# Altium PCB 边缘网关-17KF4-END.PcbDoc (part 1 of 2)
Units mil, origin at the board's own origin, x right, y up, seen from the top; angles counter-clockwise.
Board outline 8695 x 6025 mil, 2 copper layers (Top Layer, Bottom Layer); 152 components, 173 nets, 594 pads, 724 vias.
Unrouted connection lines stored in the file: 769.
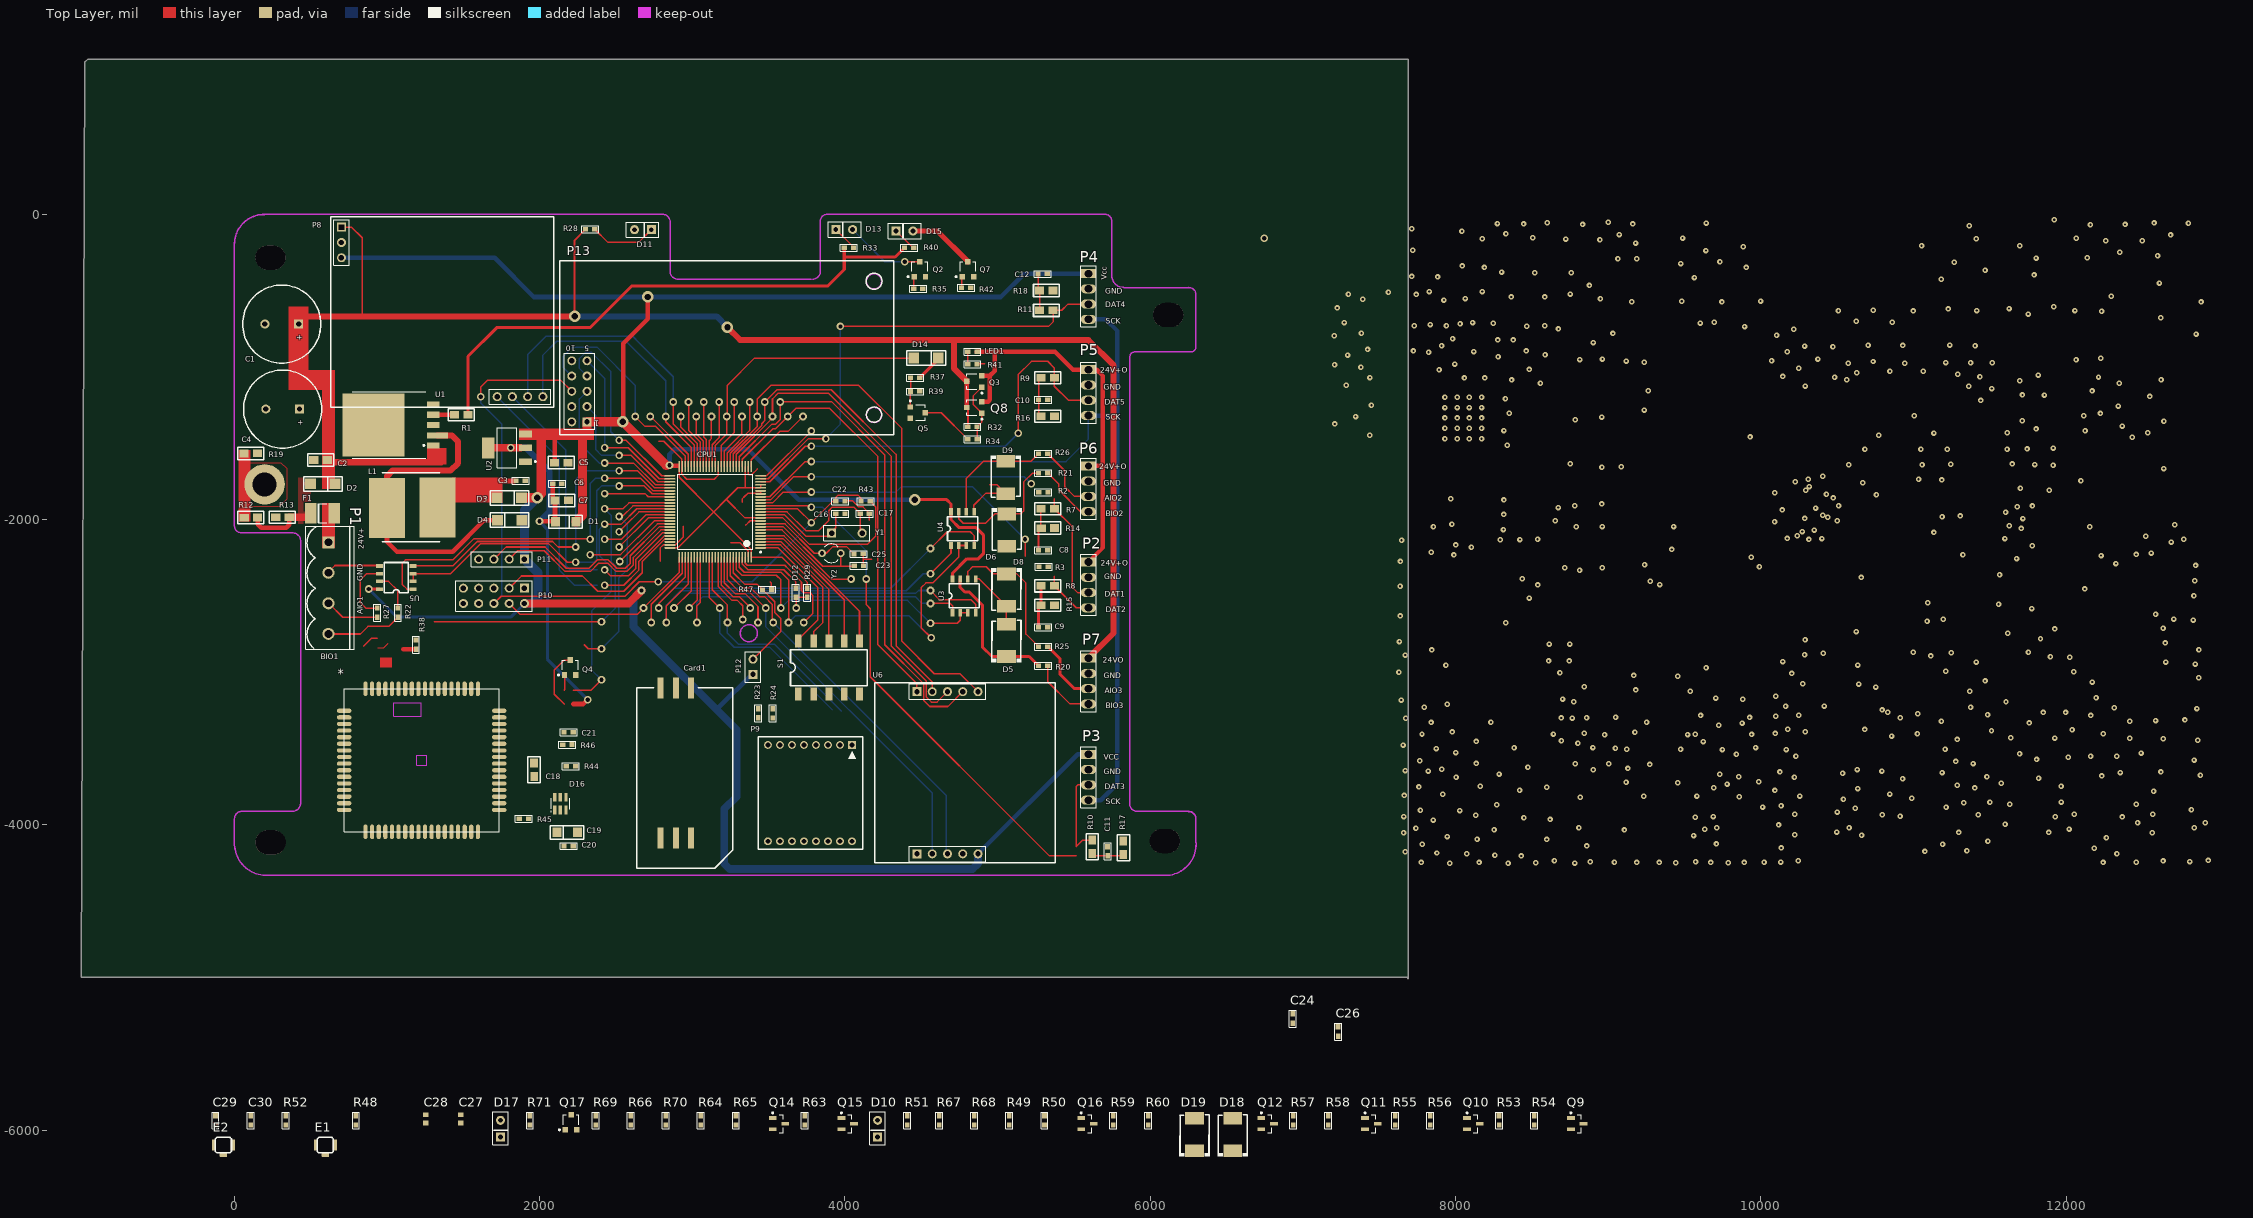
[diagram p0: Top Layer view]
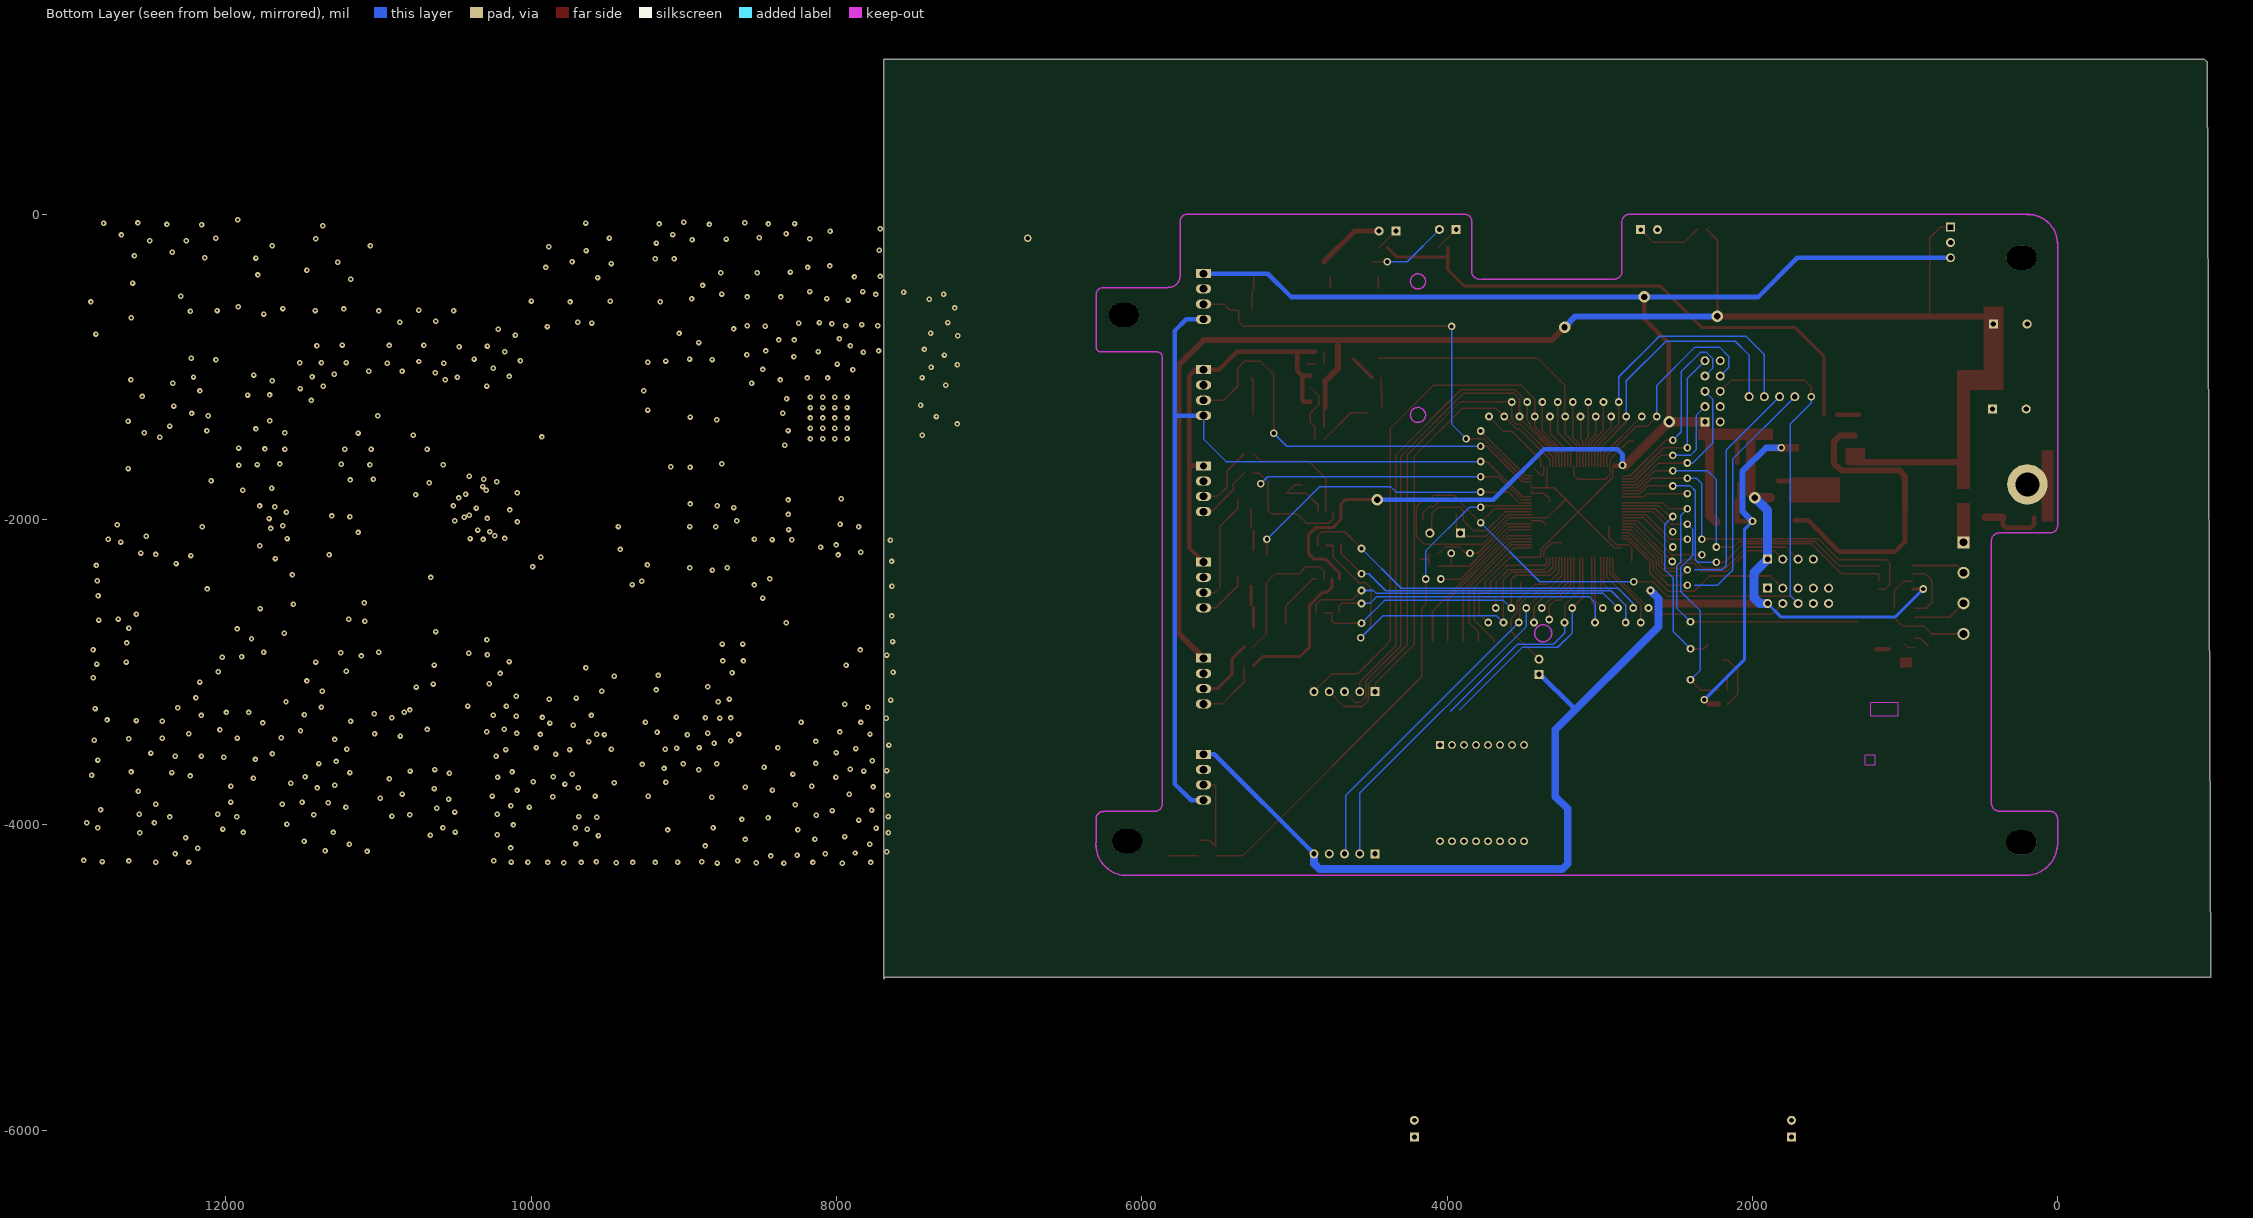
[diagram p1: Bottom Layer view, seen from below]

## Layer stack, top to bottom
Top Solder: solder mask 0.4, Solder Resist, Dk 3.5
Top Layer: signal copper 30
Dielectric1: dielectric 12.6, FR-4, Dk 4.8
Bottom Layer: signal copper 1.4
Bottom Solder: solder mask 0.4, Solder Resist, Dk 3.5

## Board outline
-980.2,997 -960.2,1017 7689.8,1017 7689.8,-5008 7679.8,-4998 -1005.2,-4998

## Design rules (kind name [scope] priority, off if disabled: settings)
Clearance Clearance_1 [All] p1: gap=6
ComponentClearance [All] p1: gap=0 collisioncheckmode=3 verticalgap=0 showdistances=FALSE
FabricationTestPointUsage TestPointUsage [All] p1: valid=0 allowmultiple=FALSE
FabricationTestpoint Testpoint [All] p1: side=3 testpointundercomponent=TRUE minsize=40 maxsize=100 preferedsize=60 minholesize=0 maxholesize=40 preferedholesize=32 testpointgrid=1 allowsidetop=TRUE allowsidebottom=TRUE usegrid=TRUE gridtolerance=0.01
HoleSize [All] p1: absolutevalues=TRUE maxlimit=10000 minlimit=0 maxpercent=80.000 minpercent=20.000
MinimumSolderMaskSliver [All] p1: minsoldermaskwidth=0
PlaneClearance PlaneClearance_1 [All] p1: clearance=5
PlaneConnect [All] p1: planeconnectstyle=Relief reliefexpansion=12 reliefentries=4 reliefconductorwidth=12 reliefairgap=20
PolygonConnect [All] p1: connectstyle=Relief reliefconductorwidth=20 reliefentries=4 polygonreliefangle="90 Angle" airgapwidth=10
RoutingVias [All] p1: holewidth=28 width=50 viastyle="Through Hole" minholewidth=0 minwidth=0 maxholewidth=2800 maxwidth=5000
SilkToSolderMaskClearance SilkscreenOverComponentPads [IsPad] p1: minsilkscreentomaskgap=0 clearancetoexposedcopper=TRUE
SolderMaskExpansion [All] p1: expansion=4
Width [All] p1: maxlimit=10000 minlimit=99999 preferedwidth=10 toplayer_minwidth=0 bottomlayer_minwidth=0 minimp=50.000000 maximp=50.000000 favimp=50.000000
22 further rules are at their usual default settings.

## Components (designator, comment, footprint, x,y, rotation, side; value= is the part's Value field where it differs from the comment)
* "U7" PCBComponent_1 719,-4046 r0 top
C1 "C_470uF/63V" C470UF50V-H 310,-720 r90 top
C2 "C_0.1uF" 0805 520,-1610 r90 top
C3 "C_0.1uF" 0603 1864.77,-1745 r0 top
C4 "2200uF/25V" C470UF50V-H 316,-1277 r90 top
C5 "100nF" 0805 2186,-1627 r270 top
C6 "100nF" 0603 2104.81,-1765 r0 top
C7 "4.7uF" 0805 2100,-1875 r90 top
C8 "C_0.1uF" 0603 5307.67,-2202 r180 top
C9 "C_0.1uF" 0603 5288.2,-2704.63 r0 top
C10 "C_0.1uF" 0603 5288.2,-1214.97 r0 top
C11 "C_0.1uF" 0603 5719,-4183 r90 top
C12 "C_0.1uF" 0603 5285,-390 r0 top
C16 "C_10pF" 0603 3960,-1960 r0 top
C17 "C_10pF" 0603 4120,-1960 r0 top
C18 "C_0.1uF" 0805 1963,-3683 r180 top
C19 "220uF" 1206 2180,-4050 r0 top
C20 "C_0.1uF" 0603 2199.06,-4140 r180 top
C21 "C_0.1uF" 0603 2199.06,-3395.04 r180 top
C22 "C_0.1uF" 0603 3960,-1880 r0 top
C23 "C_0.1uF" 0603 4081,-2302 r0 top
C24 "C_10pF" 0603 6933,-5279 r90 top
C25 "C_10pF" 0603 4079.49,-2224.49 r0 top
C26 "C_100nF" 0603 7229,-5364 r90 top
C27 "470pF" 1608[0603] 1482.8,-5927 r90 top
C28 "0.1uF" 1608[0603] 1252.8,-5927 r90 top
C29 "缺省" 0603 -125.2,-5947 r90 top
C30 "缺省" 0603 104.8,-5947 r90 top
Card1 "Card" SIM 2792,-3103 r270 top
CPU1 "STM32F103VET6" LQFP100_N 3150,-1950 r180 top
D1 "1N4148" 1206 2170,-2015 r180 top
D2 "MURA240" 1N4007-M7 663.21,-1763.98 r180 top
D3 "SS36" 1N4007-M7 1885,-1855 r180 top
D4 "SS36" 1N4007-M7 1719.05,-2007 r0 top
D5 "SMBJ6.8CA" DO-214AB 5057.77,-2791.22 r90 top
D6 "SMBJ6.8CA" DO-214AB 5060,-2070 r270 top
D8 "SMBJ6.8CA" DO-214AB 5058,-2463 r270 top
D9 "SMBJ6.8CA" DO-214AB 5053,-1724 r270 top
D10 "LED BLUE" LED-3mm 4213.8,-6046 r90 top
D11 "LED RED" LED-3MM 2731,-101 r180 top
D12 "Green" 0603 3680,-2470 r270 top
D13 "LED RED" LED-3MM 3940,-100 r0 top
D14 "1N4007" 1N4007-M7 4615,-940 r180 top
D15 "LED GREEN" LED-3MM 4335,-110 r0 top
D16 "SRV05-4" SOT23-6 2135,-3861 r0 top
D17 "LED BLUE" LED-3mm 1742.8,-6046 r90 top
D18 "SMBJ6.8CA" DO-214AB 6539.8,-6029 r90 top
D19 "SMBJ6.8CA" DO-214AB 6289.8,-6029 r90 top
E1 "Antenna" IPX 595.8,-6098 r0 top
E2 "Antenna" IPX -72.2,-6098 r0 top
F1 "自恢复保险丝" 1812 576,-1959 r0 top
L1 "贴片电感" L101 1120,-1920 r180 top
LED1 "LED 3mm" 0603 4825.53,-900 r0 top
P1 "进线端子" 5.08MM-4PL 616,-2149 r270 top
P2 "Header 4" HDR1X4#1 5595,-2278.47 r270 top
P3 "Header 4" HDR1X4#1 5595,-3538.31 r270 top
P4 "Header 4" HDR1X4#1 5595,-388.7 r270 top
P5 "Header 4" HDR1X4#1 5595,-1018.62 r270 top
P6 "Header 4" HDR1X4#2 5595,-1648.54 r270 top
P7 "Header 4" HDR1X4#1 5595,-2908.39 r270 top
P8 "Header 7" USB2 711,-715 r0 top
P9 "排针" WIFI2 4046,-3477 r270 top
P10 "SWD" HDR2X5_CEN 1900,-2450 r180 top
P11 "下载线" HDR1X4#3 1900,-2260 r180 top
P12 "跳线" HDR1X2 3397,-3015 r90 top
P13 "TCP/IP" TCP-IP 2310,-1360 r180 top
Q2 "9013" SOT-23 4490,-360 r0 top
Q3 "2N2907" Q 4798.42,-1095 r90 top
Q4 "9013" SOT-23 2200,-2970 r0 top
Q5 "5551" Q 4526,-1300 r270 top
Q7 "9013" SOT-23 4805,-360 r0 top
Q8 "2N2907" Q 4798.42,-1266 r90 top
Q9 "MMBT3904" SOT23_N 8796.8,-5958 r0 top
Q10 "MMBT3904" SOT23_N 8116.8,-5958 r0 top
Q11 "MMBT3904" SOT23_N 7448.8,-5958 r0 top
Q12 "MMBT3904" SOT23_N 6768.8,-5958 r0 top
Q14 "MMBT3904" SOT23_N 3567.8,-5958 r0 top
Q15 "MMBT3904" SOT23_N 4017.8,-5958 r0 top
Q16 "MMBT3904" SOT23_N 5588.8,-5958 r0 top
Q17 "9013" SOT-23 2205.8,-5949 r0 top
R1 "330R" 0805 1530,-1314 r270 top
R2 "1.5K" 0603 5310,-1823 r180 top
R3 "100R" 0603 5311,-2311 r180 top
R7 "50R" 0805 5283.39,-1929.57 r90 top
R8 "50R" 0805 5283.39,-2434.9 r90 top
R9 "50R" 0805 5283.39,-1071.57 r90 top
R10 "50R" 0805 5619.38,-4188.61 r180 top
R11 "50R" 0805 5275,-630 r90 top
R12 "压敏电阻" 0805 152,-1987 r270 top
R13 "压敏电阻" 0805 359,-1986 r270 top
R14 "50R" 0805 5373.39,-2055.9 r270 top
R15 "50R" 0805 5283.39,-2561.24 r90 top
R16 "50R" 0805 5283.39,-1324.24 r90 top
R17 "50R" 0805 5824,-4194 r180 top
R18 "50R" 0805 5275,-500 r90 top
R19 "压敏电阻" 0805 151,-1567 r270 top
R20 "100R" 0603 5307.67,-2960 r180 top
R21 "100R" 0603 5307.67,-1696.67 r180 top
R22 "100R" 0603 1070,-2620 r90 top
R23 "470R" 0603 3434,-3259 r270 top
R24 "470R" 0603 3528,-3260 r270 top
R25 "100R" 0603 5307.67,-2833.67 r180 top
R26 "100R" 0603 5307.67,-1570.33 r180 top
R27 "100R" 0603 935,-2620 r90 top
R28 "R_5.1K" 0603 2340,-100 r180 top
R29 "R_1K" 0603 3755,-2470 r270 top
R32 "R_10K" 0603 4845,-1394 r180 top
R33 "R_1K" 0603 4035,-220 r180 top
R34 "R_1K" 0603 4825.53,-1474 r0 top
R35 "R_2.2K" 0603 4490,-490 r180 top
R37 "R_1K" 0603 4449.81,-1070 r0 top
R38 "缺省" 0603 1191,-2810 r270 top
R39 "R_10K" 0603 4449.81,-1160 r0 top
R40 "R_1K" 0603 4430,-220 r180 top
R41 "R_5.1K" 0603 4845,-985 r180 top
R42 "R_2.2K" 0603 4803.67,-483 r180 top
R43 "R_3.3K" 0603 4125,-1880 r0 top
R44 "20R" 0603 2195,-3616 r0 top
R45 "20R" 0603 1887,-3960 r0 top
R46 "20R" 0603 2172,-3473 r0 top
R47 "R_3.3K" 0603 3500,-2460 r180 top
R48 "470R" 0603 794.8,-5947 r90 top
R49 "Res2" 0603 5075.8,-5947 r90 top
R50 "Res2" 0603 5305.8,-5947 r90 top
R51 "Res2" 0603 4405.8,-5947 r90 top
R52 "0" 0603 334.8,-5947 r90 top
R53 "10K" 0603 8283.8,-5947 r90 top
R54 "4.7K" 0603 8513.8,-5947 r90 top
R55 "10K" 0603 7603.8,-5947 r90 top
R56 "4.7K" 0603 7833.8,-5947 r90 top
R57 "10K" 0603 6935.8,-5947 r90 top
R58 "4.7K" 0603 7165.8,-5947 r90 top
R59 "10K" 0603 5755.8,-5947 r90 top
R60 "4.7K" 0603 5985.8,-5947 r90 top
R63 "10K" 0603 3734.8,-5947 r90 top
R64 "10K" 0603 3054.8,-5947 r90 top
R65 "47K" 0603 3284.8,-5947 r90 top
R66 "4.7K" 0603 2594.8,-5947 r90 top
R67 "10K" 0603 4615.8,-5947 r90 top
R68 "4.7K" 0603 4845.8,-5947 r90 top
R69 "Res2" 0603 2364.8,-5947 r90 top
R70 "Res2" 0603 2824.8,-5947 r90 top
R71 "Res2" 0603 1934.8,-5947 r90 top
S1 "贴片拨码开关" SWITCH10 3895,-2970 r0 top
U1 "LM2576HV-3.3V" TO-263(S) 900,-1380 r0 top
U2 "AMS1117-1.8V" SOT223 1785,-1530 r90 top
U3 "SN65HVD11" SN65HVD11 4780,-2500 r0 top
U4 "SN65HVD11" SN65HVD11 4770,-2060 r0 top
U5 "SN65HVD11" SN65HVD11 1060,-2380 r90 top
U6 "433M" 433M 5377,-2989.72 r270 top
Y1 "XTAL 8M" "XTAL 8M" 3912,-2089 r0 top
Y2 "XTAL  32.768K" R38 3911,-2221 r270 top

## Footprints (in the part's own frame and the unit in brackets; to place one, negate y for a bottom-side part, rotate by r counter-clockwise, add the part's x,y. Pads: shape width x height; smd on the part's side, far side on the other; paste and mask are expansions set on the pad)
1N4007-M7 [mm]
  rect 1.8x1.8 smd: 1(4.166,0.05) 2(0.096,0.05)
  silkscreen extent -1.12,-1.14 5.33,1.27
5.08MM-4PL [mm]
  rect 2x2 hole 1.3: 1(0,0)
  round 2 hole 1.3: 2(5.08,0) 3(10.16,0) 4(15.24,0)
  silkscreen extent -2.67,-3.75 17.78,4.25
433M [mm]
  rect 1.5x1.5 hole 0.9: 1(3.5,-23) 6(30.5,-23)
  round 1.5 hole 0.9: 2(3.5,-20.46) 3(3.5,-17.92) 4(3.5,-15.38) 5(3.5,-12.84) 7(30.5,-20.46) 8(30.5,-17.92) 9(30.5,-15.38) 10(30.5,-12.84)
  silkscreen extent 2,-30 32,0
0603 [mil] "0603"
  rect 35x30 smd: 1(40,-1) 2(-20.23,-1.34)
  silkscreen extent -46,-24 65,21
0805 [mil]
  rect 50x60 smd: 1(0,0) 2(0.28,-88.04)
  silkscreen extent -40,-130 40,40
1206 [mm]
  rect 1.52x1.6 smd: 1(-1.71,0) 2(1.71,0)
  silkscreen extent -2.79,-1.1 2.79,1.1
1608[0603] [mm] "Chip Capacitor, Body 1.6x0.8mm, IPC High Density"
  rect 0.8x0.9 smd: 1(-0.7,0) 2(0.7,0)
  body extent -0.87,-0.48 0.87,0.48, height 1.3
1812 [mm] "Chip Capacitor; Body 4.5 x 3.2 mm (LxW typ)"
  rect 1.9x3.4 smd: 1(-1.95,0) 2(1.95,0)
  silkscreen extent -0.7,-1.6 0.7,1.6
C470UF50V-H [mm]
  rect 1.5x1.5 hole 0.9: 1(0.02,-2.8)
  round 1.5 hole 0.9: 2(0.02,2.8)
  silkscreen extent -6.5,-6.5 6.5,6.5
DO-214AB [mm]
  rect 2.1x3.1 smd: 1(2.7,0) 2(-2.7,0)
  silkscreen extent -3.68,-2.54 3.3,2.54
HDR1X2 [mm] "Connector; Header; 2 Position"
  rect 1.5x1.5 hole 0.9: 1(0,0)
  round 1.5 hole 0.9: 2(2.54,0)
  silkscreen extent -1.27,-1.27 3.81,1.27
HDR1X4#1 [mm] "Connector; Header; 4 Position"
  rect 1.5x2.54 hole 1.27: 1(0,0)
  oval 1.5x2.54 hole 1.27: 2(2.54,0) 3(5.08,0) 4(7.62,0)
  silkscreen extent -1.27,-1.27 8.89,1.27
HDR1X4#2 [mm] "Connector; Header; 4 Position"
  rect 1.5x2.54 hole 1.143: 1(0,0)
  oval 1.5x2.54 hole 1.27: 2(2.54,0) 3(5.08,0) 4(7.62,0)
  silkscreen extent -1.27,-1.27 8.89,1.27
HDR1X4#3 [mm] "Connector; Header; 4 Position"
  rect 1.5x1.5 hole 0.9: 1(0,0)
  round 1.5 hole 0.9: 2(2.54,0) 3(5.08,0) 4(7.62,0)
  silkscreen extent -1.27,-1.27 8.89,1.27
HDR2X5_CEN [mm] "Connector; Header; 5x2 Position"
  rect 1.5x1.5 hole 0.9: 1(0,0)
  round 1.5 hole 0.9: 2(2.54,0) 3(5.08,0) 4(7.62,0) 5(10.16,0) 6(0,2.54) 7(2.54,2.54) 8(5.08,2.54) 9(7.62,2.54) 10(10.16,2.54)
  silkscreen extent -1.27,-1.27 11.43,3.81
IPX [mil]
  rrect50% 50x31.5 smd: 1(0,-63)
  rect 27.56x70.87 smd: 2(61,1) 4(-61,1)
  silkscreen extent -53,-52 53,51
L101 [mm]
  rect 6x10 smd: 1(3.056,0.127) 2(-5.342,0)
  silkscreen extent -5.72,-5.72 3.81,5.72
LED-3mm [mm]
  rect 1.5x1.5 hole 0.8: 1(0,0)
  round 1.5 hole 0.8: 2(2.794,0)
  silkscreen extent -1.27,-1.27 4.19,1.27
LED-3MM [mm] "Connector; Header; 5 Position"
  rect 1.5x1.5 hole 0.8: 1(0,0)
  round 1.5 hole 0.8: 2(2.794,0)
  silkscreen extent -1.27,-1.27 4.19,1.27
LQFP100_N [mm]
  oval 1.8x0.3 smd: 1(-7.55,6) 2(-7.55,5.5) 3(-7.55,5) 4(-7.55,4.5) 5(-7.55,4) 6(-7.55,3.5) 7(-7.55,3) 8(-7.55,2.5) 9(-7.55,2) 10(-7.55,1.5) 11(-7.55,1) 12(-7.55,0.5) 13(-7.55,0) 14(-7.55,-0.5) 15(-7.55,-1) 16(-7.55,-1.5) 17(-7.55,-2) 18(-7.55,-2.5) 19(-7.55,-3) 20(-7.55,-3.5) 21(-7.55,-4) 22(-7.55,-4.5) 23(-7.55,-5) 24(-7.55,-5.5) 25(-7.55,-6) 51(7.55,-6) 52(7.55,-5.5) 53(7.55,-5) 54(7.55,-4.5) 55(7.55,-4) 56(7.55,-3.5) 57(7.55,-3) 58(7.55,-2.5) 59(7.55,-2) 60(7.55,-1.5) 61(7.55,-1) 62(7.55,-0.5) 63(7.55,0) 64(7.55,0.5) 65(7.55,1) 66(7.55,1.5) 67(7.55,2) 68(7.55,2.5) 69(7.55,3) 70(7.55,3.5) 71(7.55,4) 72(7.55,4.5) 73(7.55,5) 74(7.55,5.5) 75(7.55,6)
  oval 0.3x1.8 smd: 26(-6,-7.55) 27(-5.5,-7.55) 28(-5,-7.55) 29(-4.5,-7.55) 30(-4,-7.55) 31(-3.5,-7.55) 32(-3,-7.55) 33(-2.5,-7.55) 34(-2,-7.55) 35(-1.5,-7.55) 36(-1,-7.55) 37(-0.5,-7.55) 38(0,-7.55) 39(0.5,-7.55) 40(1,-7.55) 41(1.5,-7.55) 42(2,-7.55) 43(2.5,-7.55) 44(3,-7.55) 45(3.5,-7.55) 46(4,-7.55) 47(4.5,-7.55) 48(5,-7.55) 49(5.5,-7.55) 50(6,-7.55) 76(6,7.55) 77(5.5,7.55) 78(5,7.55) 79(4.5,7.55) 80(4,7.55) 81(3.5,7.55) 82(3,7.55) 83(2.5,7.55) 84(2,7.55) 85(1.5,7.55) 86(1,7.55) 87(0.5,7.55) 88(0,7.55) 89(-0.5,7.55) 90(-1,7.55) 91(-1.5,7.55) 92(-2,7.55) 93(-2.5,7.55) 94(-3,7.55) 95(-3.5,7.55) 96(-4,7.55) 97(-4.5,7.55) 98(-5,7.55) 99(-5.5,7.55) 100(-6,7.55)
  silkscreen extent -7.68,-6.25 6.25,6.82, body extent -7,-7 7,7, height 1.6
PCBComponent_1 [mm]
  oval 0.7x2.4 smd: 1(3.55,0) 1(3.55,0) 2(4.65,0) 3(5.75,0) 4(6.85,0) 5(7.95,0) 6(9.05,0) 7(10.15,0) 8(11.25,0) 9(12.35,0) 10(13.45,0) 11(14.55,0) 12(15.65,0) 13(16.75,0) 14(17.85,0) 15(18.95,0) 16(20.05,0) 16(20.05,0) 17(21.15,0) 17(21.15,0) 18(22.25,0) 35(22.25,23.8) 35(22.25,23.8) 36(21.15,23.8) 37(20.05,23.8) 38(18.95,23.8) 39(17.85,23.8) 40(16.75,23.8) 41(15.65,23.8) 42(14.55,23.8) 43(13.45,23.8) 44(12.35,23.8) 45(11.25,23.8) 46(10.15,23.8) 47(9.05,23.8) 48(7.95,23.8) 49(6.85,23.8) 50(5.75,23.8) 51(4.65,23.8) 52(3.55,23.8)
  oval 2.4x0.7 smd: 19(25.8,3.65) 19(25.8,3.65) 20(25.8,4.75) 21(25.8,5.85) 22(25.8,6.95) 23(25.8,8.05) 24(25.8,9.15) 25(25.8,10.25) 26(25.8,11.35) 27(25.8,12.45) 28(25.8,13.55) 29(25.8,14.65) 30(25.8,15.75) 31(25.8,16.85) 32(25.8,17.95) 33(25.8,19.05) 34(25.8,20.15) 53(0,20.15) 53(0,20.15) 54(0,19.05) 55(0,17.95) 56(0,16.85) 57(0,15.75) 58(0,14.65) 59(0,13.55) 60(0,12.45) 61(0,11.35) 62(0,10.25) 63(0,9.15) 64(0,8.05) 65(0,6.95) 66(0,5.85) 67(0,4.75) 68(0,3.65)
  Keep-Out Layer lines w0.127: 8.255,19.26 12.85,19.26 12.85,21.46 8.255,21.46 8.255,19.26 ; 12.065,11.049 13.716,11.049 13.716,12.7 12.065,12.7 12.065,11.049
  silkscreen extent 0,0 25.8,23.8
Q [mm]
  rect 0.9x0.95 smd: 1(0.95,-2.5) 2(-0.95,-2.5) 3(0,0)
  silkscreen extent -2.07,-2.63 1.3,0
R38 [mm] "Crystal, Thru-Hole; 2 Leads; Body 3.1 x 8.2 mm (Dia.xH)"
  round 1.3 hole 0.7: 1(0,1.55) 2(0,-1.55)
  silkscreen extent -1.55,-1.19 1.55,1.17
SIM [mm]
  rect 3.5x1 smd: 1(0,0) 2(0,2.54) 3(0,5.08) 4(25,0) 5(25,2.54) 6(25,5.08)
  silkscreen extent 0,-4 30,12
SN65HVD11 [mm]
  rect 0.6x1.2 smd: 1(-1.92,-2.8) 2(-0.64,-2.8) 3(0.64,-2.8) 4(1.92,-2.8) 5(1.92,2.8) 6(0.64,2.8) 7(-0.64,2.8) 8(-1.92,2.8)
  silkscreen extent -2.5,-2 2.5,2
SOT23-6 [mm] "SOT-23/SC-74A; 5 Leads; Body 3.1 x 3 mm, inc. leads (LxW max)"
  rect 0.55x1.45 smd: 1(-0.95,-1.075) 2(0,-1.075) 3(0.95,-1.075) 4(0.95,1.075) 5(0,1.075) 6(-0.95,1.075)
  silkscreen extent -1.57,-1.35 1.55,0.9
SOT23_N [mm] "SOT23, 3-Leads, Body 2.9x1.3mm, Pitch 0.95mm, Lead Span 2.3mm, IPC Medium Density"
  rect 1.3x0.6 smd: 1(-1.05,0.95) 2(-1.05,-0.95) 3(1.05,0)
  silkscreen extent -1.17,-1.5 0.7,1.92, body extent -0.7,-1.5 0.7,1.5, height 1.1
SOT223 [mm] "SOT-223/SC-73; 4 Leads; Body 6.7 x 7.3 mm, inc. leads (LxW max)"
  rect 1.1x2.15 smd: 1(-2.3,-3.1) 2(0,-3.1) 3(2.3,-3.1)
  rect 3.5x2.15 smd: 4(0,3.1)
  silkscreen extent -3.35,-4.85 3.35,1.62
SOT-23 [mm] "SOT-23; 3 Leads; Body 3.0 x 2.6 mm, inc. leads (LxW max)"
  rect 0.9x0.95 smd: 1(-0.95,-1.25) 2(0.95,-1.25) 3(0,1.25)
  silkscreen extent -2.07,-1.37 1.3,1.25
SWITCH10 [mm]
  rect 1.1x2.2 smd: 1(-5.08,-4.4) 2(-2.54,-4.4) 3(0,-4.4) 4(2.54,-4.4) 5(5.08,-4.4) 6(5.08,4.4) 7(2.54,4.4) 8(0,4.4) 9(-2.54,4.4) 10(-5.08,4.4)
  silkscreen extent -6.4,-3 6.4,3
TCP-IP [mm]
  rect 1.5x1.5 hole 0.9: 1(0,0)
  round 1.5 hole 0.9: 2(0,-2.54) 3(0,-5.08) 4(0,-7.62) 5(0,-10.16) 6(2.54,0) 7(2.54,-2.54) 8(2.54,-5.08) 9(2.54,-7.62) 10(2.54,-10.16)
  silkscreen extent -51.05,-26.8 4.57,2.16
TO-263(S) [mm]
  rect 2.1x1.05 smd: 1(10.247,-3.425) 3(10.247,-0.025) 4(10.247,1.675) 5(10.247,3.375)
  rect 3.5x1.05 smd: 2(10.947,-1.753)
  rect 10.3x10.5 smd: 3(0.256,0)
  silkscreen extent -3.25,-5.58 9,5.52
USB2 [mm]
  rect 1.5x1.5 hole 0.9 square: 1(-0.254,16.002)
  round 1.5 hole 0.9: 2(25.654,-12.192) 3(28.194,-12.192) 4(30.734,-12.192) 5(33.274,-12.192) 6(-0.254,13.462) 7(-0.254,10.922)
  silkscreen extent -2.03,-13.97 35.05,17.78
WIFI2 [mm]
  rect 1.3x1.3 hole 0.8: 1(0,0)
  round 1.3 hole 0.8: 2(16.03,0) 3(0,-2) 4(16.03,-2) 5(0,-4) 6(16.03,-4) 7(0,-6) 8(16.03,-6) 9(0,-8) 10(16.03,-8) 11(0,-10) 12(16.03,-10) 13(0,-12) 14(16.03,-12) 15(0,-14) 16(16.03,-14)
  silkscreen extent -1.35,-15.57 17.38,1.78
"XTAL 8M" [mm]
  rect 1.5x1.5 hole 0.9: 1(0,0)
  round 1.5 hole 0.9: 2(5.08,0)
  silkscreen extent -1.27,-1.27 6.35,1.27

## Part data
*: library part Component_1
C1: library part "Cap Pol1", "插件 电解电容 13*21"
C2 C3 C5 C6 C7 C8 C9 C10 C11 C12 C16 C17 C18 C20 C21 C22 C23 C24 C25 C26: library part Cap, "贴片电容 0603"
C4: library part "Cap Pol1", "插件 体积13*20mm"
C19: library part "Cap Pol1", "Polarized Capacitor (Radial)"
C27 C28 C29 C30: library part Cap, "Capacitor"
CPU1: library part STM32F103VBT6, "贴片ARM芯片"
D1 D2: library part Diode, "贴片二极管 M7"
D3 D4: library part "Diode 1N4007", "贴片二极管 SMA"
D5 D6 D8 D9 D18 D19: "贴片双向瞬变抑制二极管 D0-214AA"
D10 D11 D13 D17: library part LED0, "插件 发光二极管 5mm 红发红光"
D12: library part "LED 3mm", "贴片发光二极管 0603 绿色"
D14: library part "Diode 1N4007", "1 Amp General Purpose Rectifier"
D15: library part LED0, "插件 发光二极管 5mm 绿发绿光"
D16: library part SMF05C, "SOT363"
E1 E2: "Generic Antenna"
F1: library part "Fuse 2", "1812 1.1A 33V"
L1: library part Inductor, "贴片电感 12*12*7mm 100uH"
LED1: "LED_R"
P1 P11: library part "Header 4", "Header, 4-Pin"
P2 P3 P4 P5 P6 P7: "Header, 4-Pin"
P8: "Header, 7-Pin"
P9: library part "Header 8X2", "插件 8P 间距2mm"
P10 P13 U6: library part "Header 5X2A", "Header, 5-Pin, Dual row"
P12: library part "Header 2", "Header, 2-Pin"
Q2 Q4 Q7 Q17: library part NPN, "贴片三极管MMBT5551 SOT-23"
Q3 Q8: library part PNP, "PNP Bipolar Transistor"
Q5: library part 2N3904, "2N3904"
Q9 Q10 Q11 Q12 Q14 Q15 Q16: "NPN Switching Transistor"
R1 R7 R8 R9 R10 R11 R14 R15 R16 R17 R18: library part Res2, "贴片电阻 0805 精度0.1%"
R2 R3 R20 R21 R22 R25 R26 R27 R29: library part Res2, "贴片电阻 0603"
R12 R13 R19: library part "Res Varistor", "耐压56V 0805"
R23 R24 R48: library part Res1, "贴片电阻 0603"
R28 R33 R35 R44 R45 R46: library part Resistor, "贴片电阻 0603"
R32 R34 R37 R38 R39 R52 R53 R54 R55 R56 R57 R58 R59 R60 R63 R64 R65 R66 R67 R68: library part Res2, "Resistor"
R40 R42: library part Resistor, "Resistor"
R41: library part Res2, "R_10K"
R43 R47: library part Res3, "贴片电阻 0603"
R49 R50 R51 R69 R70 R71: "Resistor"
S1: library part Switch, "5P 2.54MM  黑色"
U1: library part Component_1, "贴片电源芯片 TO-263"
U2: library part AS1117, "VOLTAGE REGULATOR"
U3 U4 U5: "贴片芯片"
Y1: "晶振"
Y2: library part XTAL, "晶振"

## Free pads (board coordinates)
  round 263.78 hole 157.48: 0(198.17,-1769.65)
  rrect100% 196.85x157.48 hole 157.48 slot 196.85 at 0 deg: 0(236,-285) 0(237,-4115) 0(6095.49,-4106.3) 0(6118.11,-660)

## Via types
v1: diameter 36, hole 15, Top Layer to Bottom Layer, 626 vias
v2: diameter 50, hole 28, Top Layer to Bottom Layer, 92 vias
v3: diameter 75, hole 42, Top Layer to Bottom Layer, 6 vias

## Nets (pads, with @x,y where several pads share a name; then routed paths per layer and width w, separated by ;. In a path a pad name is that pad's centre, name@x,y a point inside that pad or via, vN(x,y) a via of type N, cw(c..) or ccw(c..) an arc to the next point about the centre after c; other vN are vias at no path point)
1.8V: C6.2 C7.1 D1.2 U2.2 U2.4 | length 2414.6
  Top Layer w30: v2(1999,-2012) 2099.68,-2012 D1.2@2100,-2012.32 ; C7.1@2084.58,-1859.58 C6.2@2084.58,-1766.34 ; C7.1@2100,-1875 D1.2@2100,-2012.32 ; D1.2@2102.68,-2015 D1.2@2100,-2012.32 ; 2220.23,-3208.66 2286.34,-3208.66 v2(2315,-3180)
  Bottom Layer w20: v2(1999,-2012) 2050,-2063 2050,-2105 2050,-2915 v2(2315,-3180)
  Bottom Layer w40: v2(1810,-1530) 1910,-1530 2065,-1685 2065,-1946 v2(1999,-2012)
1P8: *.17 R54.1 R55.1 R56.1 R58.1 R59.1 R60.1 R66.1 R67.1 R68.1
24V+: C1.1 C2.2 D2.2 P7.1 P8.1 Q3.3 Q8.3 R28.1 R32.1 U1.1 | length 10090
  Top Layer w12: P8.1@701,-85 767,-85 837,-155 837,-669.21 ; v3(2228.79,-669.21) 2228.79,-170.21 R28.1@2300,-99 ; R32.1@4805,-1393 Q8.3@4805,-1272.58
  Top Layer w30: Q8.3@4798.42,-1266 Q3.3@4798.42,-1095
  Top Layer w40: 420.24,-669.21 837,-669.21 v3(2228.79,-669.21) ; C2.2@608.04,-1609.72 623.32,-1625 1355,-1625 ; v3@3229,-739 v3(3230,-740) 3314,-824 4715,-824 ; Q3.3@4798.42,-1095 4715,-1011.58 4715,-824 ; P7.1@5595,-2908.39 5760,-2743.39 5760,-990 5594,-824 4715,-824
  Bottom Layer w40: v3(2228.79,-669.21) 3159.21,-669.21 v3(3230,-740)
24VOUT: LED1.1 P2.1 P5.1 P6.1 Q3.1 Q8.1 | length 2678.6
  Top Layer w30: LED1.1@4865,-901 LED1.1@4865.53,-901 4980,-901 ; Q8.1@4896.84,-1228.6 4937.4,-1228.6 4949.4,-1216.6 4949.4,-1057.6 ; Q3.1@4896.84,-1057.6 4949.4,-1057.6 ; P2.1@5595,-2278.47 5690,-2183.47 5690,-1648.54 5690,-1060 5648.62,-1018.62 P5.1@5595,-1018.62 5493.62,-1018.62 5376,-901 4980,-901 ; P6.1@5595,-1648.54 5646.46,-1648.54 5686.54,-1648.54 ; 4949.4,-1057.6 4980,-1027 4980,-901
ADC: P9.3
AIO1: P1.3 R27.2 | length 353.7
  Top Layer w10: P1.3@620,-2550 710.23,-2640.23 R27.2@936.34,-2640.23
AIO2: P6.3 R26.2 | length 443.8
  Top Layer w10: R26.2@5327.9,-1569 5440,-1681.1 5440,-1785 5503.54,-1848.54 P6.3@5595,-1848.54
AIO3: P7.3 R25.2 | length 440.4
  Top Layer w20: R25.2@5327.9,-2832.33 5410,-2914.43 5410,-3015 5503.39,-3108.39 P7.3@5595,-3108.39
BIO1: P1.4 R22.2 | length 496.8
  Top Layer w10: P1.4@620,-2750 825,-2750 875,-2700 1011.57,-2700 R22.2@1071.34,-2640.23
BIO2: P6.4 R21.2 | length 394
  Top Layer w10: R21.2@5327.9,-1695.33 5400,-1767.43 5400,-1805 5543.54,-1948.54 P6.4@5595,-1948.54
BIO3: P7.4 R20.2 | length 431.6
  Top Layer w10: R20.2@5327.9,-2958.66 5327.9,-3062.9 5473.39,-3208.39 P7.4@5595,-3208.39
BOOT0: CPU1.94 P12.2 R47.1 | length 920.2
  Top Layer w10: CPU1.94@3268.11,-2247.24 3268.11,-2348.11 3345,-2425 3426,-2425 R47.1@3460,-2459 3540,-2539 3540,-2610 3580,-2650 3580,-2732 P12.2@3397,-2915
CTS: *.12 Q12.3 R59.2
DATE1: CPU1.17 P2.3 R7.2 | length 747.8
  Top Layer w10: 5371.43,-1865.19 R7.2@5371.43,-1929.29 5490,-2047.86 5490,-2445 5523.47,-2478.47 P2.3@5595,-2478.47
DATE2: CPU1.16 P2.4 R8.2 | length 347.3
  Top Layer w10: 5371.43,-2370.52 R8.2@5371.43,-2434.62 5515.27,-2578.47 P2.4@5595,-2578.47
DATE3: CPU1.15 P3.3 R10.2 | length 4086.7
  Top Layer w10: CPU1.15@3447.24,-1910.63 3770.63,-1910.63 v2(3780,-1920) ; v2(4140,-2390) 4140,-2559 4165,-2584 4165,-3030 5339,-4204 5514,-4204 ; P3.3@5595,-3738.31 5526.69,-3738.31 5513.66,-3751.34 5513.66,-4143.77 5556.86,-4100.57 R10.2@5619.09,-4100.57
  Bottom Layer w10: v2(3780,-1920) 3853,-1920 4140,-2207 v2(4140,-2390)
DATE4: CPU1.24 P4.3 R11.2 | length 3041.4
  Top Layer w10: CPU1.24@3447.24,-1733.46 3496.54,-1733.46 3760,-1470 v2(3875,-1470) ; v2(3970,-735) 5333.89,-735 5363.04,-705.85 R11.2@5363.04,-629.72 5420.28,-629.72 5461.3,-588.7 P4.3@5595,-588.7
  Bottom Layer w10: v2(3875,-1470) 3970,-1375 v2(3970,-735)
DATE5: CPU1.23 P5.3 R9.2 | length 2875.3
  Top Layer w10: CPU1.23@3447.24,-1753.15 3506.85,-1753.15 3740,-1520 v2(3780,-1520) ; v2(5135,-1435) 5135,-1050 5221,-964 5327.56,-964 ; 5327.9,-963.66 5371.43,-1007.19 R9.2@5371.43,-1071.29 5371.43,-1126.43 5463.62,-1218.62 P5.3@5595,-1218.62
  Bottom Layer w10: v2(3780,-1520) 5050,-1520 v2(5135,-1435)
DGND: pad.0@198.17,-1769.65 R12.2 R19.2
DTR: *.15 Q16.3 R67.2
EXT_GNSS: *.56